# Altium PCB slaves.PcbDoc
Units mil, origin at the board's own origin, x right, y up, seen from the top; angles counter-clockwise.
Board outline 4370 x 5220 mil, 2 copper layers (Top Layer, Bottom Layer); 71 components, 43 nets, 356 pads, 70 vias.
Unrouted connection lines stored in the file: 26.
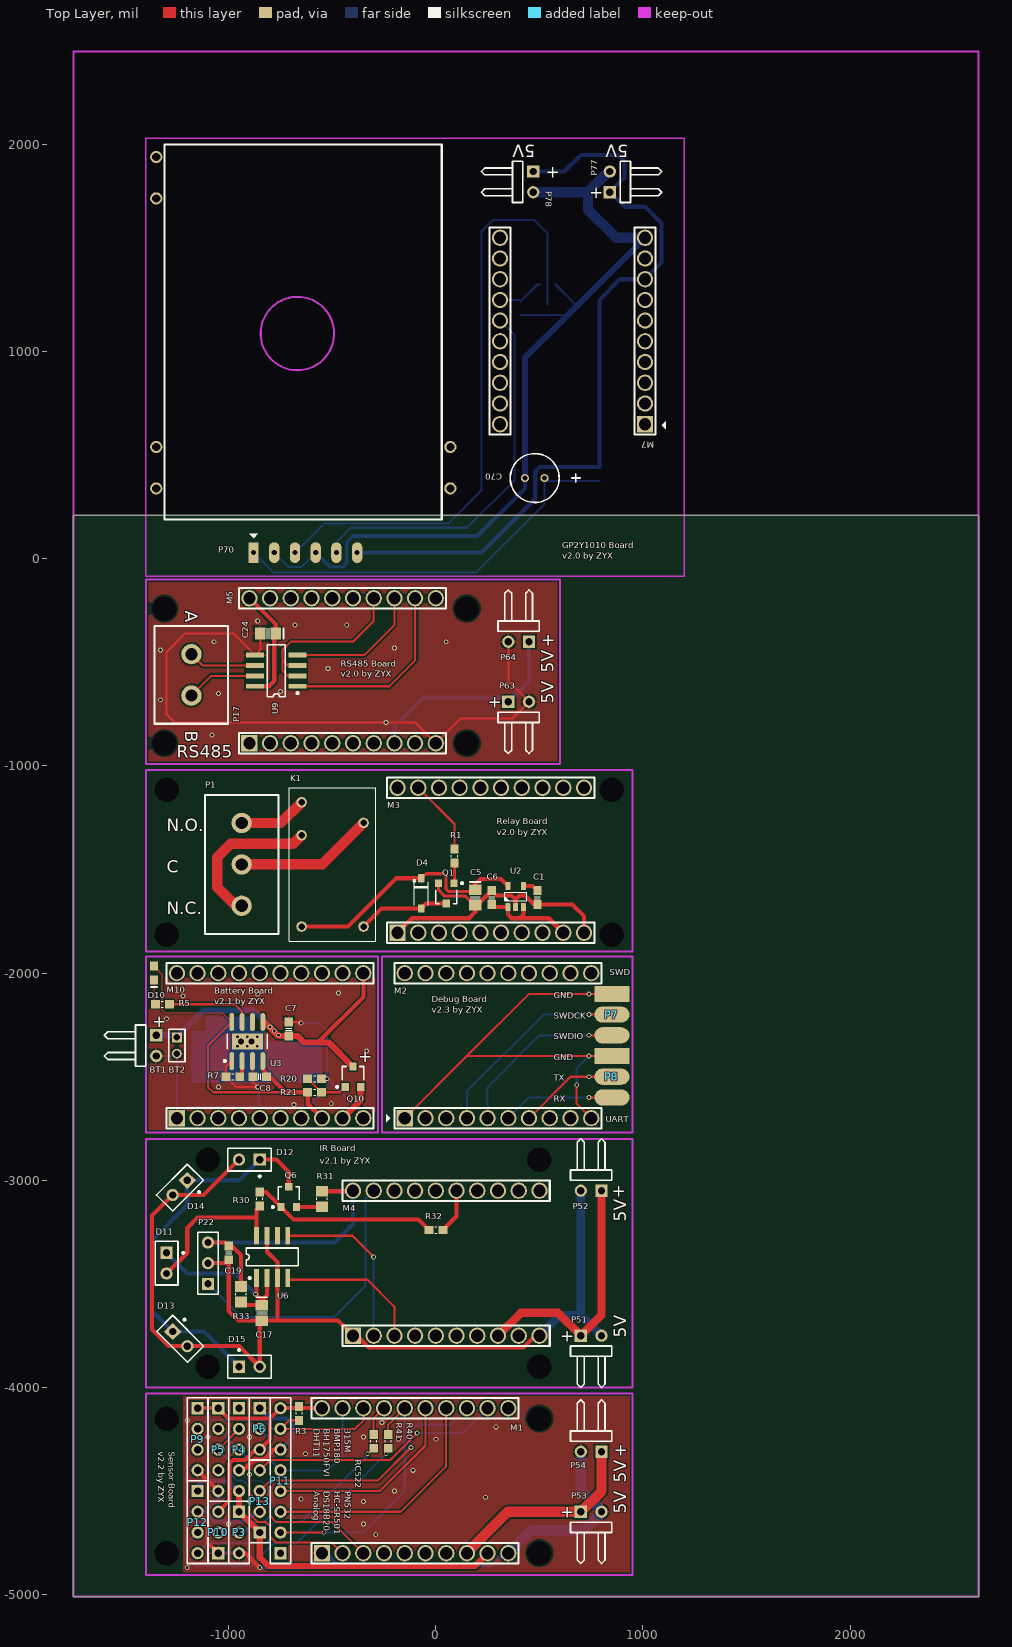
[diagram p0: Top Layer view]
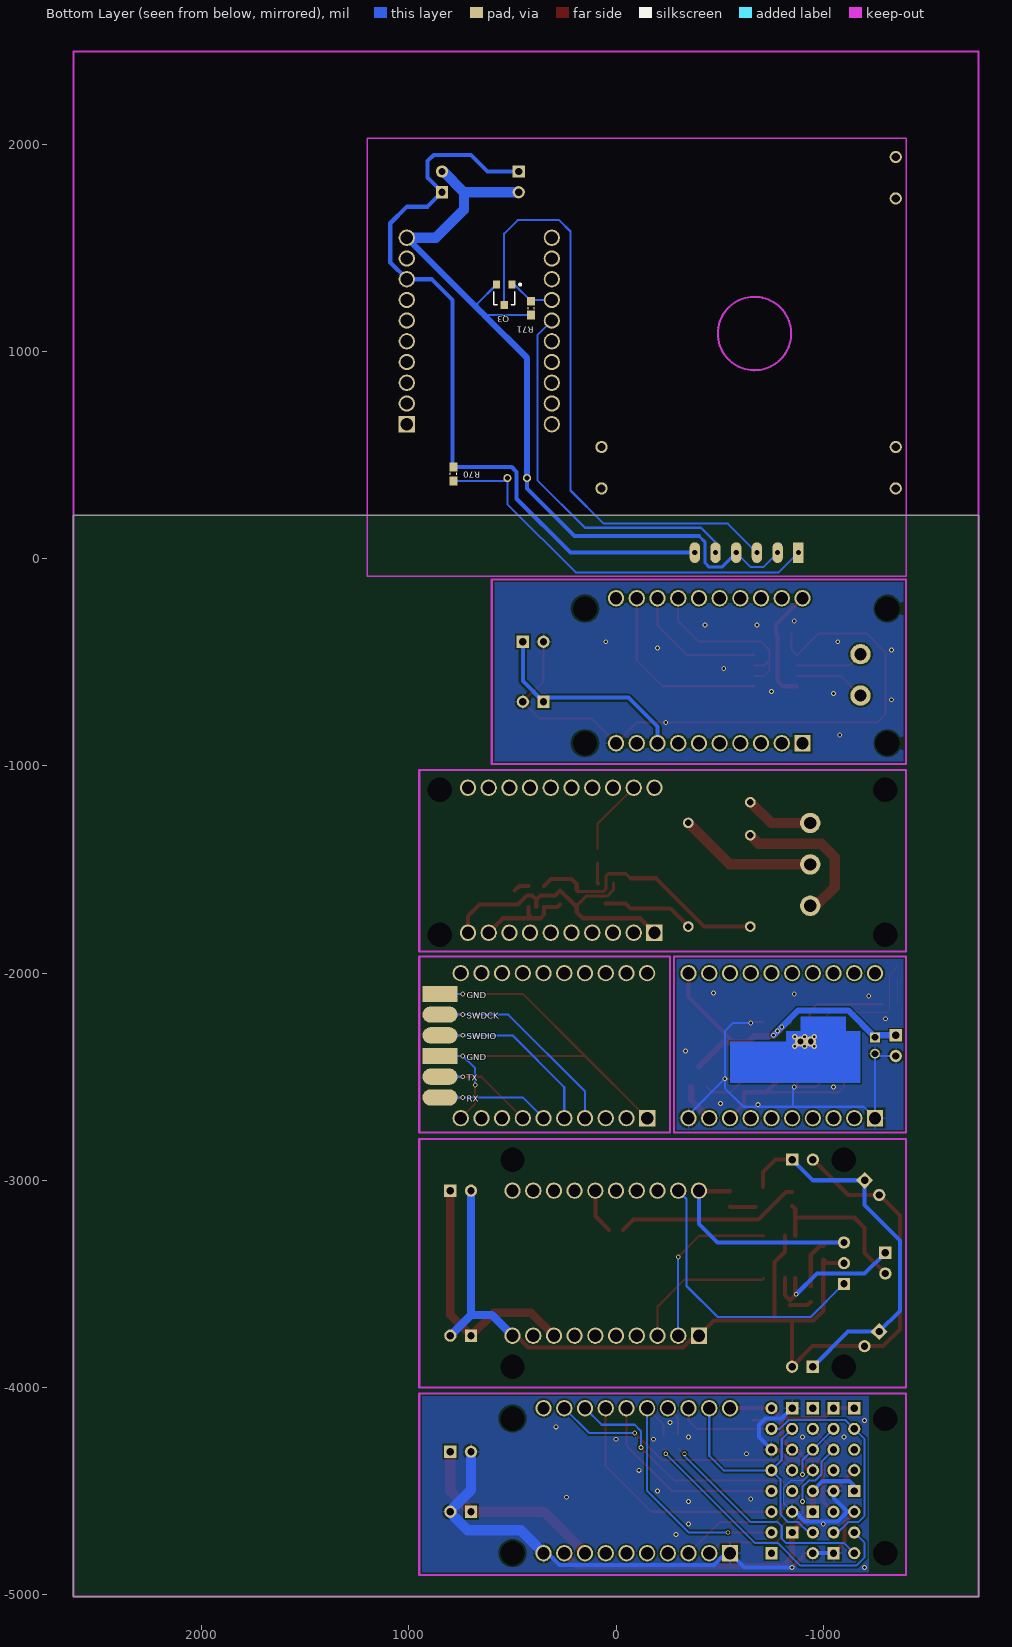
[diagram p1: Bottom Layer view, seen from below]

## Layer stack, top to bottom
Top Solder: solder mask 0.4, Solder Resist, Dk 3.5
Top Layer: signal copper 1.4
Dielectric1: dielectric 12.6, FR-4, Dk 4.8
Bottom Layer: signal copper 1.4
Bottom Solder: solder mask 0.4, Solder Resist, Dk 3.5

## Board outline
-1750,-5010 -1750,210 2620,210 2620,-5010

## Design rules (kind name [scope] priority, off if disabled: settings)
Clearance [All] p1: gap=8
ComponentClearance [All] p1 off: gap=0 collisioncheckmode=3 verticalgap=100000 showdistances=FALSE
HoleSize [All] p1: absolutevalues=TRUE maxlimit=196.85 minlimit=11.81 maxpercent=80.000 minpercent=20.000
MinimumSolderMaskSliver [All] p1: minsoldermaskwidth=0
PolygonConnect PolygonConnect_1 [IsVia vs IsPolygon] p1: connectstyle=Direct reliefconductorwidth=10 reliefentries=4 polygonreliefangle="90 Angle" airgapwidth=10
PolygonConnect [All] p2: connectstyle=Relief reliefconductorwidth=10 reliefentries=4 polygonreliefangle="90 Angle" airgapwidth=10
RoomDefinition gp2y1010 [InComponentClass('gp2y1010')] p1: confinementstyle=ConfineIn formatcopy=TRUE lockcomponents=FALSE outline -1500,-100 2110,-100 2110,2140 -1500,2140
RoomDefinition rs485 [InComponentClass('rs485')] p2: confinementstyle=ConfineIn formatcopy=TRUE lockcomponents=FALSE outline -1410,-1020 700,-1020 700,-60 -1410,-60
RoomDefinition debug [InComponentClass('debug')] p3: confinementstyle=ConfineIn formatcopy=TRUE lockcomponents=FALSE outline -331,-2852 1006,-2852 1006,-1732 -331,-1732
RoomDefinition IR [InComponentClass('IR')] p4: confinementstyle=ConfineIn formatcopy=TRUE lockcomponents=FALSE outline -1860,-4720 1180,-4720 1180,-2730 -1860,-2730
RoomDefinition battery [InComponentClass('battery')] p5: confinementstyle=ConfineIn formatcopy=TRUE lockcomponents=FALSE outline -1640,-3037.6 -255,-3037.6 -255,-1885 -1640,-1885
RoomDefinition sensors [InComponentClass('sensors')] p6: confinementstyle=ConfineIn formatcopy=TRUE lockcomponents=FALSE outline -1790,-5100 1230,-5100 1230,-4010 -1790,-4010
RoomDefinition relay [InComponentClass('relay')] p7: confinementstyle=ConfineIn formatcopy=TRUE lockcomponents=FALSE outline -3450,-5280 980,-5280 980,-530 -3450,-530
RoutingVias [All] p1: holewidth=13.78 width=23.62 viastyle="Through Hole" minholewidth=13.78 minwidth=19.68 maxholewidth=13.78 maxwidth=23.62
SilkToSolderMaskClearance SilkscreenOverComponentPads [IsPad] p1: minsilkscreentomaskgap=0 clearancetoexposedcopper=TRUE
SolderMaskExpansion [All] p1: expansion=4
UnpouredPolygon [All] p1: allowunpoured=FALSE
Width [All] p1: maxlimit=50 minlimit=6 preferedwidth=10
25 further rules are at their usual default settings.

## Classes and differential pairs
component class gp2y1010: C70 M7 P70 P77 P78 Q3 R70 R71
component class rs485: C24 M5 P17 P63 P64 U9
component class battery: BT1 BT2 C7 C8 D10 M10 Q10 R5 R7 R20 R21 U3
component class relay: C1 C5 C6 D4 K1 M3 P1 Q1 R1 U2
component class sensors: M1 P3 P4 P5 P6 P9 P10 P11 P12 P13 P53 P54 R3 R40 R41
component class IR: C17 C19 D11 D12 D13 D14 D15 M4 P22 P51 P52 Q6 R30 R31 R32 R33 U6
component class debug: M2 P7 P8

## Components (designator, comment, footprint, x,y, rotation, side; value= is the part's Value field where it differs from the comment)
BT1 "Li-Ion" HDR1X2H -1350,-2300 r270 top
BT2 "Li-Ion" "Hearder2 2" -1250,-2310 r270 top
C1 "Cap Semi" C-1608[0603] 490,-1635 r270 top
C5 "Cap Semi" C-2012[0805] 190,-1635 r270 top
C6 "Cap Semi" C-1608[0603] 270,-1635 r90 top
C7 "Cap Semi" C-1608[0603] -710,-2270 r270 top
C8 "Cap Semi" C-1608[0603] -850,-2500 r0 top
C17 "Cap Semi" C-2012[0805] -840,-3640 r270 top
C19 "Cap Semi" C-1608[0603] -1000,-3350 r90 top
C24 "Cap Semi" C-2012[0805] -810,-360 r180 top
C70 "Cap Pol1" CAPACITOR_2.4MM_6MM 430,390 r0 top
D4 "1N5819" SOD123 -70,-1615 r270 top
D10 "Charge" LED-1608[0603]-R -1360,-2000 r270 top
D11 "IR-E" PIN2 -1300,-3350 r270 top
D12 "IR-E" PIN2 -850,-2900 r180 top
D13 "IR-E" PIN2 -1270,-3730 r315 top
D14 "IR-E" PIN2 -1200,-3000 r225 top
D15 "IR-E" PIN2 -950,-3900 r0 top
K1 "Relay-S" Relay-JZC-32F-ZS -290,-1845 r90 top
M1 "MCU_IF_V2" MCU_IF_V2 -550,-4800 r90 top
M2 "MCU_IF_V2" MCU_IF_V2 -150,-2700 r90 top
M3 "MCU_IF_V2" MCU_IF_V2 -185,-1805 r90 top
M4 "MCU_IF_V2" MCU_IF_V2 -400,-3750 r90 top
M5 "MCU_IF_V1" MCU_IF_V2 -900,-890 r90 top
M7 "MCU_IF_V1" MCU_IF_V2 1010,650 r180 top
M10 "MCU_IF_V2" MCU_IF_V2 -1250,-2700 r90 top
P1 "OUT" Edge5.08mm3P -937.5,-1675 r270 top
P3 "HC-SR501" HDR1X3 -950,-4600 r270 top
P4 "BMP180" HDR1X5 -950,-4100 r270 top
P5 "BH1750FVI" HDR1X5 -1050,-4100 r270 top
P6 "315M" HDR1X3 -850,-4100 r270 top
P7 "SWD" EDGE_3_2.54 850,-2100 r270 top
P8 "UART" EDGE_3_2.54 850,-2400 r270 top
P9 "DHT11" HDR1X4 -1150,-4100 r270 top
P10 "DS18B20" HDR1X3 -1050,-4800 r90 top
P11 "RC522" HDR1X8 -750,-4800 r90 top
P12 "Analog" HDR1X4 -1150,-4500 r270 top
P13 "PN532" HDR1X4 -850,-4700 r90 top
P17 "RS485" Edge5.08mm2P -1180,-560 r90 top
P22 "IR-R" HDR1X3 -1100,-3500 r90 top
P51 "ExtPower" HDR1X2H 700,-3750 r0 top
P52 "ExtPower" HDR1X2H 800,-3050 r180 top
P53 "ExtPower" HDR1X2H 700,-4600 r0 top
P54 "ExtPower" HDR1X2H 800,-4310 r180 top
P63 "ExtPower" HDR1X2H 350,-690 r0 top
P64 "ExtPower" HDR1X2H 450,-400 r180 top
P70 "GP2Y1010" GP2Y1010AU0F -1310,190 r90 top
P77 "ExtPower" HDR1X2H 840,1770 r90 top
P78 "ExtPower" HDR1X2H 470,1870 r270 top
Q1 "S8050" SOT23B 50,-1615 r180 top
Q3 "SI2302" SOT23B 540,1275 r0 bottom
Q6 "8550" SOT-23B -710,-3080 r0 top
Q10 "SI2301" SOT23B -400,-2500 r0 top
R1 "Res Semi" R-1608[0603] 90,-1435 r90 top
R3 "Res Semi" R-1608[0603] -660,-4125 r270 top
R5 "Res Semi" R-1608[0603] -1320,-2150 r0 top
R7 "Res Semi" R-1608[0603] -980,-2500 r0 top
R20 "Res Semi" R-1608[0603] -585,-2510 r0 top
R21 "Res Semi" R-1608[0603] -585,-2575 r0 top
R30 "Res Semi" R-1608[0603] -850,-3090 r90 top
R31 "Res Semi" R-2012[0805] -550,-3090 r270 top
R32 "Res Semi" R-1608[0603] 0,-3240 r180 top
R33 "Res Semi" R-2012[0805] -940,-3550 r270 top
R40 "Res Semi" R-1608[0603] -230,-4260 r270 top
R41 "Res Semi" R-1608[0603] -300,-4260 r270 top
R70 "Res Semi" R-1608[0603] 785,410 r90 bottom
R71 "Res Semi" R-1608[0603] 410,1210 r270 bottom
U2 "MIC5219-3.3" SOT23-5 385,-1630 r90 top
U3 "TP4056" TP4056 -910,-2330 r90 top
U6 "HXD019" SOP8 -790,-3370 r0 top
U9 "MAX3485" SOP8 -770,-540 r90 top

## Footprints (in the part's own frame and the unit in brackets; to place one, negate y for a bottom-side part, rotate by r counter-clockwise, add the part's x,y. Pads: shape width x height; smd on the part's side, far side on the other; paste and mask are expansions set on the pad)
C-1608[0603] [mm] "Chip Capacitor; Body 1.6 x 0.8 mm (LxW typ)"
  rect 1.1x1 smd: 1(-0.85,0) 2(0.85,0)
  silkscreen extent -0.13,-0.38 0.13,0.38, body extent -0.8,-0.42 0.8,0.38, height 0.29
C-2012[0805] [mm] "Chip Capacitor; Body 2.0 x 1.2 mm (LxW typ)"
  rect 1.3x1.5 smd: 1(-0.95,0) 2(0.95,0)
  silkscreen extent -1.9,-0.65 0.13,0.65, body extent -1,-0.64 1,0.62, height 0.78
CAPACITOR_2.4MM_6MM [mm]
  round 1 hole 0.6: 1(2.4,0) 2(0,0)
  silkscreen extent -1.8,-3 6.75,3
Edge5.08mm2P [mm] "绿色接线端子5.0"
  round 2.5 hole 1.5: 1(-2.54,0) 2(2.54,0)
  silkscreen extent -6,-4.5 6,4.5
Edge5.08mm3P [mm] "绿色接线端子5.0"
  round 2.5 hole 1.5: 1(-10.16,0) 2(-5.08,0) 3(0,0)
  silkscreen extent -13.61,-4.5 3.45,4.5
EDGE_3_2.54 [mil]
  rect 78x170 smd: 1(0,0)
  rect 78x170 smd far side: 1(0,0)
  oval 78x170 smd: 2(100,0) 3(200,0)
  oval 78x170 smd far side: 2(100,0) 3(200,0)
GP2Y1010AU0F [mil]
  round 59.06 hole 39.37: 0(150,40) 0(150,-1380) 0(350,40) 0(350,-1380) 0(1550,40) 0(1750,40)
  rect 100x50 hole 25: 1(-160,-430)
  oval 100x50 hole 25: 2(-160,-530) 3(-160,-630) 4(-160,-730) 5(-160,-830) 6(-160,-930)
  Keep-Out Layer circle w10: c897.64,-641.73 r177.17
  silkscreen extent 0,-1339 1811,0
HDR1X2H [mm] "Connector; Header; 2 Position; Right Angle"
  rect 1.5x1.5 hole 0.9: 1(0,0)
  round 1.5 hole 0.9: 2(2.54,0)
  silkscreen extent -1.27,-6.35 3.81,-1.27
HDR1X3 [mm] "Connector; Header; 3 Position"
  rect 1.5x1.5 hole 0.9: 1(0,0)
  round 1.5 hole 0.9: 2(2.54,0) 3(5.08,0)
  silkscreen extent -1.27,-1.27 6.35,1.27
HDR1X4 [mm] "Connector; Header; 4 Position"
  rect 1.5x1.5 hole 0.9: 1(0,0)
  round 1.5 hole 0.9: 2(2.54,0) 3(5.08,0) 4(7.62,0)
  silkscreen extent -1.27,-1.27 8.89,1.27
HDR1X5 [mm] "Connector; Header; 5 Position"
  rect 1.5x1.5 hole 0.9: 1(0,0)
  round 1.5 hole 0.9: 2(2.54,0) 3(5.08,0) 4(7.62,0) 5(10.16,0)
  silkscreen extent -1.27,-1.27 11.43,1.27
HDR1X8 [mm] "Connector; Header; 8 Position"
  rect 1.5x1.5 hole 0.9: 1(0,0)
  round 1.5 hole 0.9: 2(2.54,0) 3(5.08,0) 4(7.62,0) 5(10.16,0) 6(12.7,0) 7(15.24,0) 8(17.78,0)
  silkscreen extent -1.27,-1.27 19.05,1.27
"Hearder2 2" [mm]
  rect 1.2x1.2 hole 0.8: 1(0,0)
  round 1.2 hole 0.8: 2(2,0)
  silkscreen extent -1,-1 3,1
LED-1608[0603]-R [mm] "Chip Diode; Body 1.6 x 0.8 mm (LxW typ)"
  rect 1.1x1 smd: 1(-0.85,0) 2(0.85,0)
  silkscreen extent 1.7,-0.4 1.7,0.4, body extent -0.82,-0.44 0.88,0.46, height 0.9
MCU_IF_V2 [mm]
  rect 2x2 hole 1.5: 1(0,0)
  round 2 hole 1.5: 2(0,-2.54) 3(0,-5.08) 4(0,-7.62) 5(0,-10.16) 6(0,-12.7) 7(0,-15.24) 8(0,-17.78) 9(0,-20.32) 10(0,-22.86) 11(17.78,-22.86) 12(17.78,-20.32) 13(17.78,-17.78) 14(17.78,-15.24) 15(17.78,-12.7) 16(17.78,-10.16) 17(17.78,-7.62) 18(17.78,-5.08) 19(17.78,-2.54) 20(17.78,0)
  silkscreen extent -1.27,-24.13 19.05,1.27
PIN2 [mm] "Photosensitive Diode; 2 Leads"
  rect 1.5x1.5 hole 0.9: 1(0,0)
  round 1.5 hole 0.9: 2(2.54,0)
  silkscreen extent -1.4,-1.4 3.94,2.18
R-1608[0603] [mm] "Chip Resistor; Body 1.6 x 0.8 mm (LxW typ)"
  rect 1.1x1 smd: 1(-0.85,0) 2(0.85,0)
  silkscreen extent -0.13,-0.38 0.13,0.38, body extent -1.27,-0.51 1.33,0.49, height 0.48
R-2012[0805] [mm] "Chip Resistor; Body 2.0 x 1.3 mm (LxW typ)"
  rect 1.3x1.5 smd: 1(-0.95,0) 2(0.95,0)
  silkscreen extent -0.13,-0.64 0.13,0.64, body extent -1.5,-0.69 1.5,0.71
Relay-JZC-32F-ZS [mm]
  round 1.3 hole 0.8: 1(14.48,1.5) 2(12.98,9.1) 3(17.02,9.1) 4(1.78,1.5) 5(1.78,9.1)
  silkscreen extent 0,0 18.8,10.6
SOD123 [mm] "SOD-123; 2 Leads; Body 2.7 x 1.6 mm, (LxW)"
  round 0.508 on Mech15: 0(0,0)
  rrect25% 1x0.8 smd: 1(1.85,0) 2(-1.85,0)
  silkscreen extent -1.75,-1 1.45,0.85, body extent -1.95,-0.9 1.95,0.9, height 1.18
SOP8 [mm] "Small Outline; 8 Leads; Body Width 4.3 mm; Pitch 1.27 mm"
  rect 0.6x2.2 smd: 1(-1.905,-2.6) 2(-0.635,-2.6) 3(0.635,-2.6) 4(1.905,-2.6) 5(1.905,2.6) 6(0.635,2.6) 7(-0.635,2.6) 8(-1.905,2.6)
  silkscreen extent -3.17,-2.72 3.17,1.1
SOT23-5 [mm]
  round 0.5 on Mech15: 0(0,0)
  rrect25% 1x0.6 smd: 1(-1.3,0.95) 2(-1.3,0) 3(-1.3,-0.95) 4(1.3,-0.95) 5(1.3,0.95)
  silkscreen extent -0.51,-1.35 0.51,1.35, body extent -1.4,-1.45 1.4,1.45, height 1.44
SOT23B [mm] "SOT-23; 3 Leads; Body 3.0 x 2.6 mm, inc. leads (LxW max)"
  rect 0.9x0.95 smd: 1(-0.95,-1.25) 2(0.95,-1.25) 3(0,1.25)
  silkscreen extent -2.08,-1.37 1.3,1.25, body extent -1.52,-1.27 1.48,1.27, height 1.1
SOT-23B [mm] "SOT-23; 3 Leads; Body 3.0 x 2.6 mm, inc. leads (LxW max)"
  rect 0.9x0.95 smd: 1(-0.95,-1.25) 2(0.95,-1.25) 3(0,1.25)
  silkscreen extent -2.07,-1.37 1.3,1.25
TP4056 [mm] "SOIC, 8-Leads, Body 4.9x3.9mm (max), Pitch 1.27mm, IPC Medium Density"
  oval 2.2x0.6 smd: 1(-2.4,1.905) 2(-2.4,0.635) 3(-2.4,-0.635) 4(-2.4,-1.905) 5(2.4,-1.905) 6(2.4,-0.635) 7(2.4,0.635) 8(2.4,1.905)
  rect 2x3.8 smd: SINK(0,0)
  silkscreen extent -2.52,-2.45 0.9,2.88, body extent -1.95,-2.45 1.95,2.45, height 1.7

## Part data
BT1 BT2: library part Battery, "Multicell Battery"
C1 C5 C6 C7 C8 C17 C19 C24: "Capacitor (Semiconductor SIM Model)"
C70: "Polarized Capacitor (Radial)"
D4: library part "D Schottky", "Schottky Diode"
D10: library part LED2, "Typical RED, GREEN, YELLOW, AMBER GaAs LED"
D11 D12 D13 D14 D15: library part LED0, "Typical INFRARED GaAs LED"
K1: library part Relay-SPDT, "Single-Pole Dual-Throw Relay"
M1 M2 M3 M4 M10: library part MCU_IF_V1
P1 P7 P8: library part "Header 3", "Header, 3-Pin"
P3 P6 P10: "Header, 3-Pin"
P4: "Header, 5-Pin"
P9 P12 P13: "Header, 4-Pin"
P11: "Header, 8-Pin"
P17: library part "Header 2", "Header, 2-Pin"
P22: library part IR, "Header, 3-Pin"
P51 P52 P53 P54 P63 P64 P77 P78: library part "Header 2H", "Header, 2-Pin, Right Angle"
P70: library part "Header 6", "Header, 6-Pin"
Q1: library part 2N3904, "NPN General Purpose Amplifier"
Q3: "N-Channel MOSFET"
Q6: library part PNP, "PNP Bipolar Transistor"
Q10: library part MOSFET-P, "P-Channel MOSFET"
R1 R3 R5 R7 R20 R21 R30 R31 R32 R33 R40 R41 R70 R71: "Semiconductor Resistor"
U2: library part MIC5219, "500mA-Peak Output LDO Regulator"

## Free pads (board coordinates)
  round 0 hole 118.11: 0(-1300,-1115) 1(850,-1115) 2(850,-1815) 3(-1310,-890) 3(-1310,-240) 3(-1300,-4800) 3(-1300,-4150) 3(-1300,-1815) 3(-1100,-3900) 3(-1100,-2900) 3(150,-890) 3(150,-240) 3(500,-4800) 3(500,-4150) 3(500,-3900) 3(500,-2900)

## Via types
v1: diameter 23.62, hole 13.78, Top Layer to Bottom Layer, 59 vias
v2: diameter 25.98, hole 12.99, Top Layer to Bottom Layer, tented top, 6 vias
v3: diameter 19.68, hole 13.78, Top Layer to Bottom Layer, 3 vias
v4: diameter 50, hole 28, Top Layer to Bottom Layer, 2 vias

## Nets (pads, with @x,y where several pads share a name; then routed paths per layer and width w, separated by ;. In a path a pad name is that pad's centre, name@x,y a point inside that pad or via, vN(x,y) a via of type N, cw(c..) or ccw(c..) an arc to the next point about the centre after c; other vN are vias at no path point)
ADD: P5.4
GND: BT1.2 BT2.2 C1.2 C5.2 C6.2 C7.1 C8.1 C17.2 C19.1 C24.2 C70.2 D12.2 D13.2 D14.2 D15.2 M1.1 M1.10 M2.1 M2.10 M3.1 M3.10 M4.1 M4.10 M5.10 M7.10 M10.1 M10.10 P3.3 P4.4 P5.5 P6.1 P7.1 P8.1 P9.4 P10.1 P11.6 P12.2 P13.2 P22.2 P51.2 P52.2 P53.2 P54.2 P63.2 P64.2 P70.2 P70.4 P77.2 P78.2 Q1.2 Q3.2 R7.1 R20.2 R71.2 U2.2 U3.1 U3.3 U6.3 U6.7 U9.5 | length 23086.9
  Top Layer w10: U3.1 -1013.46,-2452.95 R7.1 -963.46,-2550 v1(-860,-2550) -885,-2525 U3.3 ; C24.2 -847.4,-440.04 U9.5 -977.36,-360 -1210,-360 -1300,-450 -1300,-750 -1260,-790 v1(-240,-790) -100,-790 M5.10 120,-770 370,-770 P63.2 350,-590 P64.2 ; C7.1 -653.46,-2236.54 v1(-650,-2240) ; R20.2 v1(-525,-2510) ; M2.1 150,-2400 ; v1(680,-2540) 680,-2630 M2.10 ; P8.1@850,-2400 v1(740,-2400) 150,-2400 ; P7.1@850,-2100 v1(740,-2100) 450,-2100 150,-2400
  Top Layer w15: Q1.2 12.6,-1597.6 43,-1628 143.36,-1628 187.76,-1672.4 C5.2
  Top Layer w20: P12.2 -1150,-4604.94 -1102.47,-4652.47 -1102.47,-4747.53 P10.1 ; P9.4 P5.5 ; P22.2@-1110,-3400 P22.2 -1016.54,-3400 C19.1 -1000,-3630 -952.6,-3677.4 C17.2 ; P3.3 -920,-4800 v1(-850,-4870) ; P4.4 -930,-4400 -877.53,-4347.53 -830.05,-4347.53 -782.53,-4300 P11.6 ; D12.2 -1120.71,-3070.71 D14.2 -1370,-3170 -1370,-3720 -1289.29,-3800.71 D13.2 -949.29,-3800.71 D15.2 -850,-3687.4 C17.2 ; U6.7 -815,-3345 -765,-3395 U6.3 -765,-3672.4 -770,-3677.4 ; M3.1 -115,-1735 160,-1735 190,-1705 C5.2 199.13,-1672.4 C6.2 293.46,-1625 365,-1625 385,-1645 ; U2.2 385,-1645 ; M4.10 481.13,-3750 423.76,-3807.37 -323.76,-3807.37 -381.13,-3750 M4.1 -472.6,-3677.4 -770,-3677.4 ; M3.10 715,-1725 658.46,-1668.46 C1.2 473.46,-1668.46 430,-1625 405,-1625 385,-1645 ; C17.2 -770,-3677.4
  Bottom Layer w6: P4.4 -950,-4402.26 -902.26,-4450 -842.69,-4450 -809,-4483.69 -809,-4559 P13.2
  Bottom Layer w10: BT1.2 -1261.26,-2400 BT2.2 M10.1 -1195,-2645 -855,-2645 ; v1(-860,-2550) -855,-2555 -855,-2645 ; P70.2 -710,-40 -650,-40 P70.4 ; v1(-650,-2240) -565,-2240 -525,-2280 v1(-525,-2510) ; M10.10 -350,-2685 v1(-525,-2510) ; R71.2 636.54,1176.54 647.5,1187.5 ; Q3.2 670,1231.61 670,1210 ; v1(680,-2540) 680,-2460 v1(740,-2400) P8.1@850,-2400 ; v1(740,-2100) P7.1@850,-2100 ; -855,-2645 -615,-2645 -525,-2555 v1(-525,-2510)
  Bottom Layer w15: P70.4 -510,-40 -450,-40 -430,-20 -430,80 -400,110
  Bottom Layer w20: P10.1 P3.3 ; P5.5 -1050,-4532.79 -1117.21,-4600 -1069.69,-4647.53 -913.02,-4647.53 -865.49,-4600 P13.2 ; v1(-850,-4870) -620,-4870 M1.1 -531.13,-4800 -473.76,-4857.37 273.76,-4857.37 331.13,-4800 M1.10 ; P6.1 -849,-4100 -799,-4150 -721,-4150 -690,-4181 -690,-4240 P11.6 ; -400,110 200,110 430,340 C70.2
  Bottom Layer w30: C70.2 430,970 636.54,1176.54 ; 647.5,1187.5 670,1210 M7.10
  Bottom Layer w40: M4.10 600,-3650 700,-3650 ; P52.2 700,-3650 ; P51.2 700,-3650
  Bottom Layer w50: M1.10 460,-4690 715.72,-4690 800,-4605.72 P53.2 800,-4594.28 700,-4494.28 P54.2 ; P78.2 734.28,1770 ; P77.2 834.28,1870 734.28,1770 ; M7.10 870,1550 734.28,1685.72 734.28,1770
  other v1: -1200,-4870 -290,-4710 -1000,-4660 -350,-4660 -350,-4550 -650,-4539 240,-4530 -200,-4500 -110,-4400 -630,-4320 -180,-4250 0,-4250 -1100,-4240 -900,-4240 -350,-4240 290,-4190 -260,-4170 -1200,-4160 -685,-2635 -505,-2630 -1050,-2550 -335,-2375 -1300,-2220 -1220,-2110 -860,-2100 -470,-2095 -1080,-850 -1330,-680 -1050,-650 -750,-640 -520,-530 -1330,-440 -200,-430 -1070,-400 50,-400 -680,-320 -430,-320 -860,-300
NetC1_1: C1.1 U2.4 | length 77
  Top Layer w20: U2.4 467.28,-1578.82 C1.1
NetC17_1: C17.1 D11.1 R33.2 U6.1 U6.2 | length 855.1
  Top Layer w20: R33.2 -924.8,-3602.6 C17.1 ; U6.1 -865,-3555 -840,-3580 -815,-3555 U6.2
  Bottom Layer w20: D11.1 -1200,-3450 -970,-3450 v1(-870,-3550)
NetC70_1: C70.1 P70.1 R70.1 | length 1976.9
  Bottom Layer w10: P70.1 -785,-65 195,-65 524.49,264.49 C70.1 537.95,376.54 R70.1 R70.1@790,376.54
NetD4_1: D4.1 K1.4 Q1.3 | length 445
  Top Layer w20: K1.4 -349.06,-1775 -261.89,-1687.83 D4.1 -46.38,-1664.21 Q1.3
NetD10_2: D10.2 R5.1 | length 110
  Top Layer w6: R5.1@-1360,-2143.46 D10.2
NetD11_2: D11.2 R30.1 U6.8 | length 767.5
  Top Layer w20: D11.2 -1200,-3350 -1200,-3230 -1150,-3180 -865,-3180 ; U6.8 -865,-3180 ; R30.1 -865,-3138.46 -865,-3180
NetD12_1: D12.1 D13.1 D14.1 D15.1 Q6.3 | length 1859.3
  Top Layer w20: D12.1 -770,-2900 -710,-2960 Q6.3
  Bottom Layer w20: D15.1 -1120,-3730 D13.1 -1370,-3630 -1370,-3290 -1200,-3120 D14.1 -950,-3000 D12.1
NetP12_3: P12.3 R40.2 | length 1371.6
  Top Layer w10: v3(-240,-4320) -240,-4303.46 R40.2
  Bottom Layer w10: P12.3 -1200,-4750 -1200,-4820 -1160,-4860 -890,-4860 -780,-4750 -670,-4750 v3(-240,-4320)
NetP12_4: P12.4 R41.2 | length 1100.8
  Top Layer w10: v3(-330,-4320) -326.54,-4320 R41.2
  Bottom Layer w10: P12.4 -1100,-4750 -820,-4750 -800,-4730 -800,-4670 -780,-4650 -650,-4650 -330,-4330 v3(-330,-4320)
NetP17_1: P17.1 U9.7 | length 347
  Top Layer w10: P17.1 -1085,-565 U9.7
NetP17_2: P17.2 U9.6 | length 330.4
  Top Layer w10: P17.2 -1125,-515 U9.6
NetP70_3: P70.3 Q3.3 | length 2988.2
  Bottom Layer w10: P70.3 -540,170 60,170 220,330 220,1580 275,1635 475,1635 540,1570 Q3.3
NetQ1_2: Q1.1 R1.1 | length 98.4
  Top Layer w15: Q1.1@90,-1563.19 R1.1
  Top Layer w20: Q1.1 Q1.1@90,-1563.19
NetQ6_2: Q6.1 R30.2 R32.2 | length 892.5
  Top Layer w20: R30.2 -820.08,-3056.54 Q6.1 -686.61,-3190 -83.46,-3190 R32.2
NetQ6_3: Q6.2 R31.2 | length 123.3
  Top Layer w20: Q6.2 -551.81,-3129.21 R31.2
NetQ10_2: Q10.1 R20.1 R21.2 | length 218.7
  Top Layer w10: R20.1 -553.46,-2575 R21.2 -463.19,-2575 Q10.1
NetR5_2: R5.2 U3.7 | length 416.5
  Top Layer w10: R5.2 -970,-2150 -935,-2185 U3.7
NetR7_2: R7.2 U3.2 | length 80.3
  Top Layer w20: R7.2 -935,-2488.46 U3.2
OUT_A: K1.2 P1.3 | length 750.4
  Top Layer w50: P1.3 -965,-1675 -1055,-1585 -1055,-1440 -990,-1375 -689.29,-1375 K1.2
OUT_B: K1.1 P1.2 | length 671.3
  Top Layer w50: P1.2 -549.13,-1475 K1.1
OUT_C: K1.3 P1.1 | length 330.7
  Top Layer w50: P1.1 -748.35,-1275 K1.3
PA0: M1.19 M4.19 P3.2 P6.2 P11.5 P22.1 | length 2589.2
  Bottom Layer w10: P22.1 -940,-3660 -490,-3660 -340,-3510 -340,-3090 M4.19 ; P3.2 -930,-4700 -880,-4650 -830,-4650 -793,-4613 -793,-4443 P11.5 ; P6.2 -800,-4250 -800,-4350 P11.5 ; M1.19 -450,-4330 -520,-4400 P11.5
PA1: M1.18 P9.2 P10.2 P11.7 R3.2 | length 1642.9
  Top Layer w10: R3.2 -708.46,-4158.46 P11.7 -390,-4200 -350,-4160 M1.18
  Bottom Layer w10: P10.2 -1070,-4700 -1120,-4650 -1170,-4650 -1200,-4620 -1200,-4250 P9.2 -1107.47,-4157.47 -832.38,-4157.47 -789.86,-4200 P11.7
PA4: M1.17 R41.1 | length 147.2
  Top Layer w10: R41.1 -300,-4150 M1.17
PA5: M1.16 M4.16 P11.2 R40.1 U6.6 | length 1242.5
  Top Layer w10: P11.2 v3(-540,-4700) ; R40.1 -230,-4180 M1.16
  Bottom Layer w10: v3(-540,-4700) -350,-4700 -150,-4500 M1.16
PA6: M1.15 M4.15 M7.15 P11.4 P70.5 R32.1 | length 3021.9
  Top Layer w10: P11.4 -270,-4500 -50,-4280 M1.15
  Top Layer w20: R32.1 100,-3173.46 M4.15
  Bottom Layer w10: P70.5 -480,80 -410,150 150,150 380,380 380,1080 M7.15
PA7: M1.14 M5.14 M7.14 P11.3 Q3.1 R71.1 U9.2 U9.3 | length 2273.3
  Top Layer w10: P11.3 -170,-4600 50,-4380 M1.14 ; U9.2 -715,-565 -740,-540 -740,-490 ; U9.3 -715,-515 -740,-490 ; M5.14 -300,-300 -400,-400 -700,-400 -740,-440 -740,-490
  Bottom Layer w10: M7.14 403.46,1250 R71.1 490.75,1324.21 Q3.1
PA9: M2.7 P8.2 | length 592.8
  Top Layer w10: M2.7 650,-2500 v1(740,-2500) P8.2@850,-2500
  Bottom Layer w10: v1(740,-2500) P8.2@850,-2500
PA10: M2.6 P8.3 | length 651.4
  Top Layer w10: v1(740,-2600) P8.3@850,-2600
  Bottom Layer w10: M2.6 450,-2600 v1(740,-2600) P8.3@850,-2600
PA13: M2.5 P7.3 | length 963.6
  Top Layer w10: v1(740,-2300) P7.3@850,-2300
  Bottom Layer w10: M2.5 250,-2550 500,-2300 v1(740,-2300) P7.3@850,-2300
PA14: M2.4 P7.2 | length 1093.3
  Top Layer w10: v1(740,-2200) P7.2@850,-2200
  Bottom Layer w10: M2.4 150,-2570 520,-2200 v1(740,-2200) P7.2@850,-2200
PB6: M1.3 M4.3 P4.3 P5.2 U6.4 | length 1783.6
  Top Layer w10: v1(-900,-4420) -900,-4510.14 -860.14,-4550 -820,-4550 -800,-4570 -800,-4620 -770,-4650 -500,-4650 M1.3 ; U6.4 -707.36,-3480 -330,-3480 -200,-3610 M4.3
  Bottom Layer w10: P5.2 P4.3 -900,-4350 v1(-900,-4420)
PB7: M1.2 M4.2 P4.2 P5.3 U6.5 | length 1936.7
  Top Layer w10: P5.3 P4.2 ; v1(-900,-4550) -900,-4610.14 -860.14,-4650 -820,-4650 -800,-4670 -800,-4720 -772.37,-4747.63 -505.25,-4747.63 -452.88,-4800 M1.2 ; U6.5 -402.36,-3267.64 v1(-300,-3370)
  Bottom Layer w10: P5.3 -992.53,-4357.47 -992.53,-4417.62 -960.14,-4450 -930,-4450 -900,-4480 v1(-900,-4550) v1@-900,-4560 ; M4.2 v1(-300,-3370)
PB10: M1.13 M5.13 P13.3 U9.4 | length 1870.2
  Top Layer w10: P13.3 -800,-4450 -280,-4450 v1(-120,-4290) ; U9.4 -345,-465 -200,-320 M5.13
  Bottom Layer w10: v1(-120,-4290) -120,-4210 -90,-4180 70,-4180 M1.13
PB11: M1.12 M5.12 P13.4 U9.1 | length 2143.7
  Top Layer w10: P13.4 -800,-4350 -220,-4350 v1(-90,-4220) ; U9.1 -225,-615 -100,-490 M5.12
  Bottom Layer w10: v1(-90,-4220) 130,-4220 M1.12
RE_CTL: M3.19 R1.2 | length 369
  Top Layer w10: M3.19 90,-1280 R1.2
V_RELAY: C5.1 D4.2 K1.5 U2.5 | length 1228
  Top Layer w15: D4.2 -47.83,-1520 37,-1520 48.31,-1531.32 48.31,-1593.31 60,-1605 C5.1@182.6,-1605
  Top Layer w20: K1.5 -424.92,-1774.92 -192.17,-1542.17 D4.2 ; C5.1@182.6,-1605 C5.1 190,-1570 215,-1545 313.78,-1545 U2.5
VBAT: BT1.1 BT2.1 C7.2 M1.11 M10.11 Q10.3 U3.5 | length 1648
  Top Layer w20: -570,-2335 -350,-2115 M10.11
  Top Layer w30: U3.5 -827.95,-2235.51 -760,-2303.46 C7.2 -666.54,-2303.46 -635,-2335 -570,-2335 -515.79,-2335 Q10.3
  Bottom Layer w30: BT1.1 -1260,-2300 BT2.1 -1120,-2180 -880,-2180 v1(-800,-2260) v1(-780,-2280) v1(-760,-2300)
VCC: C19.2 C24.1 M1.20 M4.20 M5.20 P5.1 P6.3 P9.1 P10.3 P11.8 P22.3 R3.1 R31.1 R33.1 U9.8 | length 3209.6
  Top Layer w10: M4.20@-402.6,-3052.6 M4.20
  Top Layer w20: P9.1 P5.1 -1000,-4150 -800,-4150 ; P22.3 -1016.54,-3300 C19.2 -983.46,-3316.54 -940,-3360 R33.1 ; P10.3 -997.53,-4547.53 -997.53,-4367.53 -980,-4350 -920,-4350 -870,-4300 P6.3 -800,-4250 -800,-4150 ; M5.20 -772.6,-317.4 C24.1 -780,-367.4 -780,-590 -805,-615 U9.8 ; M1.20 P11.8 -800,-4150 ; R31.1 M4.20@-402.6,-3052.6
  Bottom Layer w10: M1.20@-566.54,-4116.54 M1.20
  Bottom Layer w20: P22.3 -490,-3300 -400,-3210 M4.20
VDD: C6.1 M1.9 M3.9 M10.9 P3.1 P4.5 P12.1 P13.1 Q10.2 U2.1 U2.3 | length 2429.8
  Top Layer w20: C6.1 282.72,-1681.18 U2.1 347.6,-1717.6 365,-1735 405,-1735 ; U2.3 422.4,-1717.6 405,-1735 ; M3.9 545,-1735 405,-1735
  Top Layer w30: P4.5 P3.1 P13.1 -850,-4820 -807.63,-4862.37 187.63,-4862.37 M1.9 ; M10.9 -362.6,-2612.6 Q10.2
  Bottom Layer w20: P12.1 -1150,-4474.94 -1127.53,-4452.47 -997.53,-4452.47 P4.5
VUSB: C8.2 D10.1 M1.8 M4.8 M5.8 M7.8 M10.8 P51.1 P52.1 P53.1 P54.1 P63.1 P64.1 P70.6 P77.1 P78.1 R21.1 R70.2 U3.4 U3.8 | length 8782.6
  Top Layer w6: D10.1 -1320,-2006.54 -1320,-2180 -1310,-2190 -1030.51,-2190 U3.8
  Top Layer w10: U3.8 -1100,-2350.51 -1100,-2550 -1075,-2575 -725,-2575
  Top Layer w20: U3.4 -835,-2465 -725,-2575 R21.1 -618.46,-2631.54 M10.8
  Top Layer w40: M4.8 410,-3640 590,-3640 P51.1 800,-3650 P52.1
  Top Layer w50: M1.8 150,-4797.65 347.65,-4600 P53.1 800,-4500 P54.1
  Bottom Layer w20: P70.6 220,30 480,290 480,420 503.46,443.46 R70.2 790,443.46 790,1250 890,1350 M7.8 1090,1430 1090,1620 1010,1700 910,1700 P77.1 910,1840 910,1920 880,1950 700,1950 620,1870 P78.1 ; M5.8 -200,-810 -60,-670 330,-670 P63.1 450,-590 P64.1
pads on no net: D4.0 M1.4 M1.5 M1.6 M1.7 M2.2 M2.3 M2.8 M2.9 M2.11 M2.12 M2.13 M2.14 M2.15 M2.16 M2.17 M2.18 M2.19 M2.20 M3.2 M3.3 M3.4 M3.5 M3.6 M3.7 M3.8 M3.11 M3.12 M3.13 M3.14 M3.15 M3.16 M3.17 M3.18 M3.20 M4.4 M4.5 M4.6 M4.7 M4.9 M4.11 M4.12 M4.13 M4.14 M4.17 M4.18 M5.1 M5.2 M5.3 M5.4 M5.5 M5.6 M5.7 M5.9 M5.11 M5.15 M5.16 M5.17 M5.18 M5.19 M7.1 M7.2 M7.3 M7.4 M7.5 M7.6 M7.7 M7.9 M7.11 M7.12 M7.13 M7.16 M7.17 M7.18 M7.19 M7.20 M10.2 M10.3 M10.4 M10.5 M10.6 M10.7 M10.12 M10.13 M10.14 M10.15 M10.16 M10.17 M10.18 M10.19 M10.20 P4.1 P9.3 P11.1 P70.0 U2.0 U3.6 U3.SINK
copper on no net:
  other v2: -957.24,-2353.62 -910,-2353.62 -862.76,-2353.62 -957.24,-2306.38 -910,-2306.38 -862.76,-2306.38
  other v4: -940,-2330 -890,-2330

## Polygon pours and split planes (outlines as drawn)
GND on Top Layer "Bottom Layer-No Net" (solid, remove dead copper, pour order 11): -1400,-100 -1400,-990 600,-990 600,-100
GND on Top Layer "Top Layer" (solid, remove dead copper, pour order 7): -1400,-1920 -1400,-2770 -280,-2770 -280,-1920
GND on Top Layer "Top Layer" (solid, remove dead copper, pour order 6): -1220,-4030 -1220,-4905 950,-4905 950,-4030
GND on Bottom Layer "Bottom Layer-No Net" (solid, remove dead copper, pour order 15): -1400,-100 -1400,-990 600,-990 600,-100
GND on Bottom Layer "Top Layer" (solid, remove dead copper, pour order 8): -1400,-1920 -1400,-2770 -280,-2770 -280,-1920
GND on Bottom Layer "Top Layer" (solid, remove dead copper, pour order 5): -1220,-4040.12 -1220,-4905 950,-4905 950,-4030

## Keep-outs
Keep-Out Layer:
  lines w7: -1400,-85 1200,-85 1200,2030 -1400,2030 -1400,-85
  lines w10: -1750,-5010 2620,-5010 2620,2450 -1750,2450 -1750,-5010 ; -1400,-4905 -1400,-4030 950,-4030 950,-4905 -1400,-4905 ; -1400,-4000 950,-4000 950,-2800 -1400,-2800 -1400,-4000 ; -1400,-2770 -280,-2770 -280,-1920 -1400,-1920 -1400,-2770 ; -1400,-1895 950,-1895 950,-1020 -1400,-1020 -1400,-1895 ; -1400,-990 600,-990 600,-100 -1400,-100 -1400,-990 ; -260,-2770 950,-2770 950,-1920 -260,-1920 -260,-2770

## Other copper
Bottom Layer:
  rectangle: -820,-2530 -550,-2330
  rectangle: -1110,-2290 -890,-2210
  rectangle: -1180,-2530 -820,-2280

## Silkscreen, mask and mechanical layers (free items; w line width, h text height)
Top Overlay:
  region: -900,120 -860,120 -880,100
  region: 1110,665 1110,625 1090,645
  region: -240,-2720 -240,-2680 -220,-2700
  text "5V" at 480,2000 h60 r180
  text "5V" at 930,2000 h60 r180
  text "+" at 530,1840 h60
  text "+" at 740,1740 h60
  text "GP2Y1010 Board" at 610,50 h30
  text "v2.0 by ZYX" at 610,0 h30
  text "A" at -1210,-250 h60 r270
  text "+" at 510,-420 h60
  text "RS485 Board" at -460,-520 h30
  text "5V" at 570,-550 h60 r90
  text "v2.0 by ZYX" at -460,-570 h30
  text "5V" at 570,-700 h60 r90
  text "+" at 250,-720 h60
  text "B" at -1210,-830 h60 r270
  text "RS485" at -1250,-960 h60
  text "Relay Board" at 295,-1280 h30
  text "N.O." at -1300,-1315 h60
  text "v2.0 by ZYX" at 295,-1335 h30
  text "C" at -1300,-1515 h60
  text "N.C." at -1300,-1715 h60
  text "Battery Board" at -1070,-2100 h30
  text "GND" at 570,-2120 h30
  text "Debug Board" at -20,-2140 h30
  text "v2.1 by ZYX" at -1070,-2150 h30
  text "v2.3 by ZYX" at -20,-2190 h30
  text "SWDCK" at 570,-2220 h30
  text "+" at -1370,-2260 h60
  text "SWDIO" at 570,-2320 h30
  text "GND" at 570,-2420 h30
  text "+" at -375,-2430 h60
  text "TX" at 570,-2520 h30
  text "RX" at 570,-2620 h30
  text "IR Board" at -560,-2860 h30
  text "v2.1 by ZYX" at -560,-2920 h30
  text "+" at 850,-3080 h60
  text "5V" at 920,-3200 h60 r90
  text "5V" at 920,-3760 h60 r90
  text "+" at 600,-3780 h60
  text "v2.2 by ZYX" at -1340,-4310 h30 r270
  text "Sensor Board" at -1290,-4310 h30 r270
  text "+" at 860,-4330 h60
  text "5V" at 920,-4460 h60 r90
  text "5V" at 920,-4610 h60 r90
  text "+" at 600,-4630 h60
Bottom Overlay:
  text "GND" at 720,-2120 h30
  text "SWDCK" at 720,-2220 h30
  text "SWDIO" at 720,-2320 h30
  text "GND" at 720,-2420 h30
  text "TX" at 720,-2520 h30
  text "RX" at 720,-2620 h30
Bottom Solder:
  rectangle: -1100,-2290 -900,-2220
  rectangle: -1170,-2340 -830,-2290
  rectangle: -1170,-2520 -560,-2340